# Altium PCB Board Seven Segment.PcbDoc
Units mm, origin at the board's own origin, x right, y up, seen from the top; angles counter-clockwise.
Board outline 140 x 90 mm, 2 copper layers (Top Layer, Bottom Layer); 41 components, 32 nets, 73 pads, 0 vias.
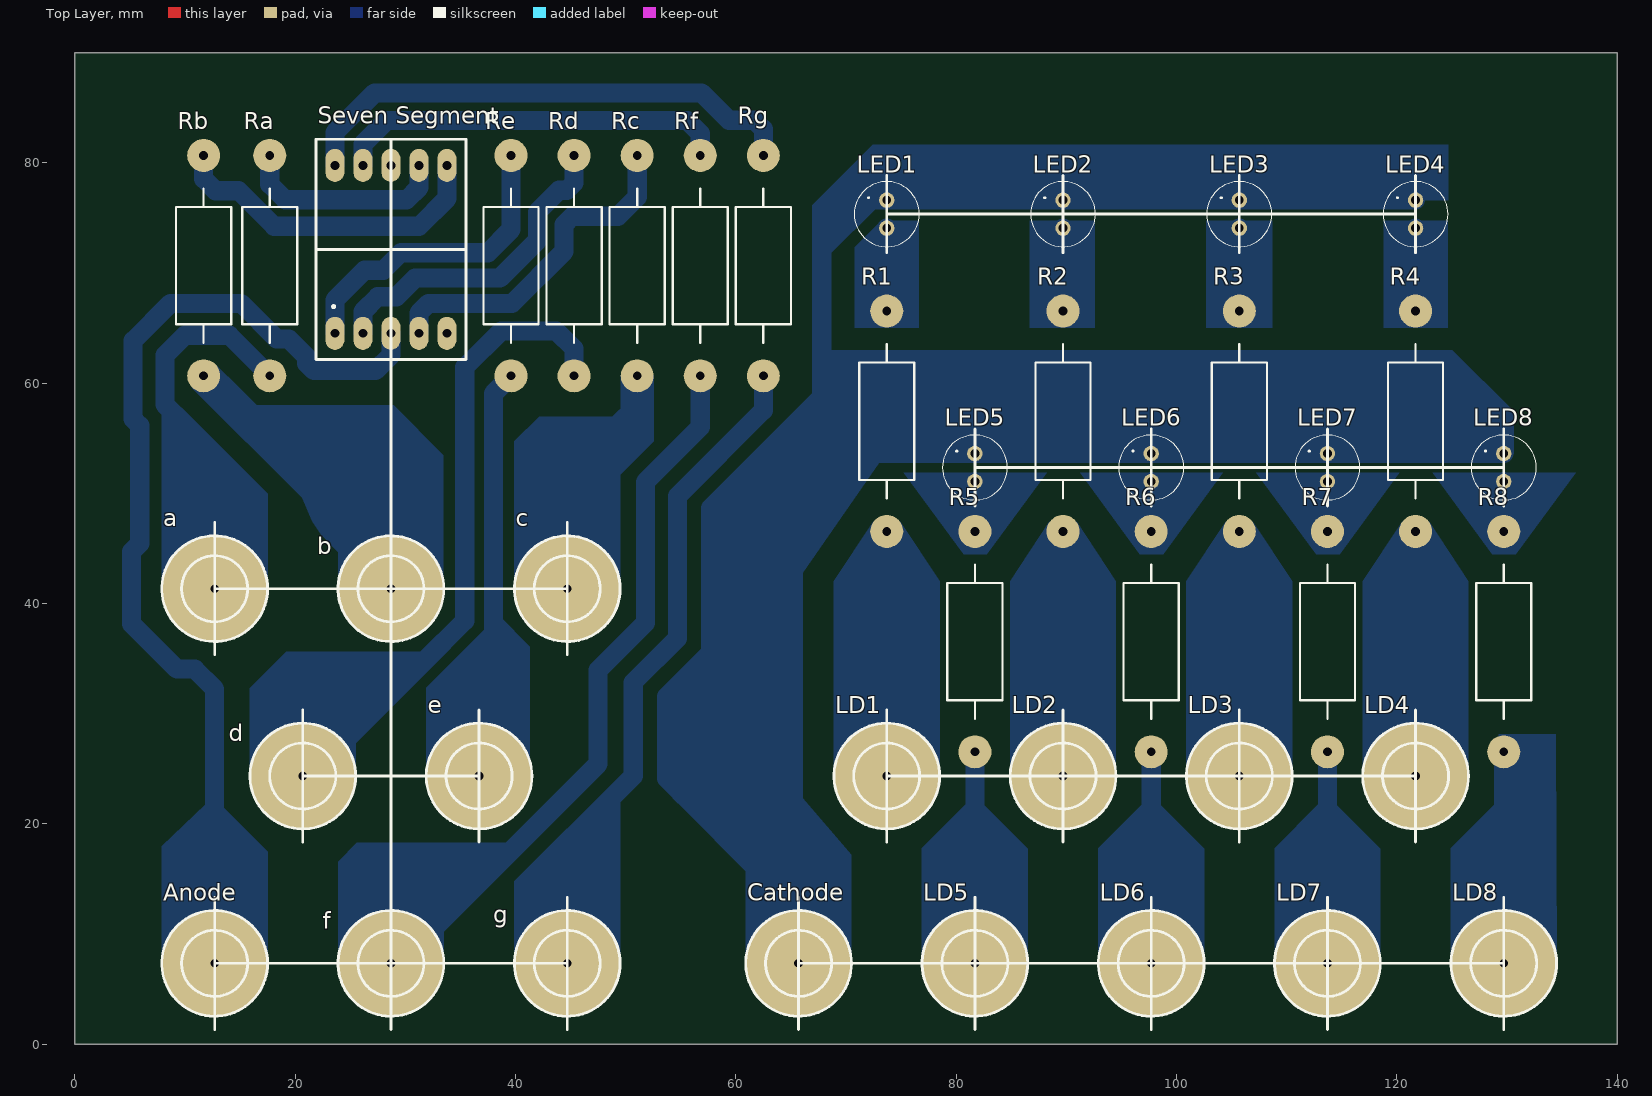
[diagram p0: Top Layer view]
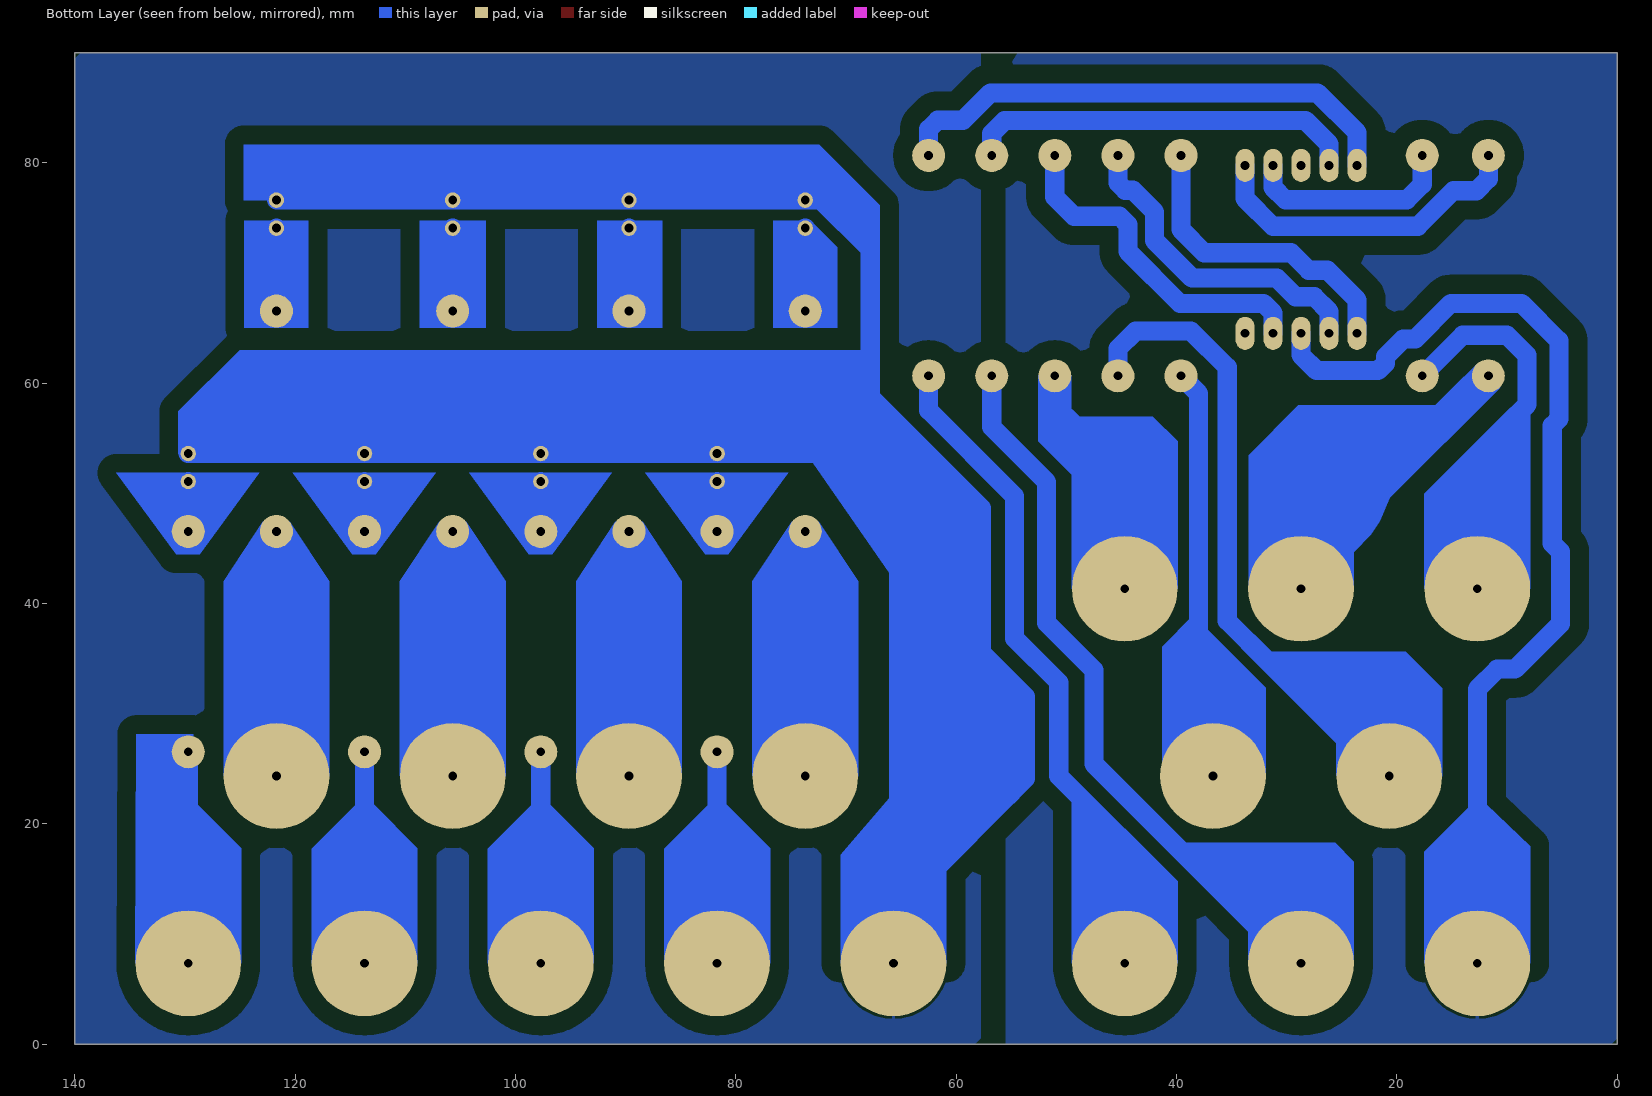
[diagram p1: Bottom Layer view, seen from below]

## Layer stack, top to bottom
Top Solder: solder mask 0.0102, Solder Resist, Dk 3.5
Top Layer: signal copper 0.0356
Dielectric 1: dielectric 0.32, FR-4, Dk 4.8
Bottom Layer: signal copper 0.0356
Bottom Solder: solder mask 0.0102, Solder Resist, Dk 3.5

## Board outline
0,0 140,0 140,90.001 0,90.001

## Design rules (kind name [scope] priority, off if disabled: settings)
Clearance [All] p1: gap=1.75 ignorepadtopadclearanceinfootprint=FALSE
PolygonConnect [All] p1: connectstyle=Relief reliefconductorwidth=0.254 reliefentries=4 polygonreliefangle="90 Angle" airgapwidth=0.254
RoutingVias [All] p1: holewidth=0.711 width=1.27 viastyle="Through Hole" minholewidth=0.711 minwidth=1.27 maxholewidth=0.711 maxwidth=1.27
SolderMaskExpansion [All] p1: expansion=0.102
Width [All] p1: maxlimit=0.254 minlimit=0.254 preferedwidth=0.254
30 further rules are at their usual default settings.

## Components (designator, comment, footprint, x,y, rotation, side; value= is the part's Value field where it differs from the comment)
a "Female_Connector_Banana" F_BANANA 12.7,41.353 r0 top locked
Anode "Female_Connector_Banana" F_BANANA 12.7,7.353 r0 top locked
b "Female_Connector_Banana" F_BANANA 28.7,41.353 r90 top locked
c "Female_Connector_Banana" F_BANANA 44.7,41.353 r0 top locked
Cathode "Female_Connector_Banana" F_BANANA 65.7,7.353 r0 top locked
d "Female_Connector_Banana" F_BANANA 20.7,24.353 r90 top locked
e "Female_Connector_Banana" F_BANANA 36.7,24.353 r0 top locked
f "Female_Connector_Banana" F_BANANA 28.7,7.353 r90 top locked
g "Female_Connector_Banana" F_BANANA 44.7,7.353 r90 top locked
LD1 "Female_Connector_Banana" F_BANANA 73.7,24.353 r0 top locked
LD2 "Female_Connector_Banana" F_BANANA 89.7,24.353 r0 top locked
LD3 "Female_Connector_Banana" F_BANANA 105.7,24.353 r0 top locked
LD4 "Female_Connector_Banana" F_BANANA 121.7,24.353 r0 top locked
LD5 "Female_Connector_Banana" F_BANANA 81.7,7.353 r0 top locked
LD6 "Female_Connector_Banana" F_BANANA 97.7,7.353 r0 top locked
LD7 "Female_Connector_Banana" F_BANANA 113.7,7.353 r0 top locked
LD8 "Female_Connector_Banana" F_BANANA 129.7,7.353 r0 top locked
LED1 "228-5045" 2285045 73.7,75.353 r0 top locked
LED2 "228-5045" 2285045 89.7,75.353 r0 top locked
LED3 "228-5045" 2285045 105.7,75.353 r0 top locked
LED4 "228-5045" 2285045 121.7,75.353 r0 top locked
LED5 "228-5045" 2285045 81.7,52.353 r0 top locked
LED6 "228-5045" 2285045 97.7,52.353 r0 top locked
LED7 "228-5045" 2285045 113.7,52.353 r0 top locked
LED8 "228-5045" 2285045 129.7,52.353 r0 top locked
R1 "1K" Resistor 73.7,56.553 r270 top locked
R2 "1K" Resistor 89.7,56.553 r270 top locked
R3 "1K" Resistor 105.7,56.553 r270 top locked
R4 "1K" Resistor 121.7,56.553 r270 top locked
R5 "1K" Resistor 81.7,36.553 r270 top locked
R6 "1K" Resistor 97.7,36.553 r270 top locked
R7 "1K" Resistor 113.7,36.553 r270 top locked
R8 "1K" Resistor 129.7,36.553 r270 top locked
Ra "1K" Resistor 17.7,70.678 r270 top locked
Rb "1K" Resistor 11.7,70.678 r270 top locked
Rc "1K" Resistor 51.05,70.678 r90 top locked
Rd "1K" Resistor 45.325,70.678 r90 top locked
Re "1K" Resistor 39.6,70.678 r90 top locked
Rf "1K" Resistor 56.775,70.678 r270 top locked
Rg "1K" Resistor 62.5,70.678 r270 top locked
"Seven Segment" "5161AS-Seven-Segment" 5161AS-Seven-Segment 28.7,72.153 r0 top locked

## Footprints (in the part's own frame and the unit in brackets; to place one, negate y for a bottom-side part, rotate by r counter-clockwise, add the part's x,y. Pads: shape width x height; smd on the part's side, far side on the other; paste and mask are expansions set on the pad)
5161AS-Seven-Segment [mm]
  oval 1.72x3 hole 0.8: 1(-5.08,-7.62) 2(-2.54,-7.62) 3(0,-7.62) 4(2.54,-7.62) 5(5.08,-7.62) 6(5.08,7.62) 7(2.54,7.62) 8(0,7.62) 9(-2.54,7.62) 10(-5.08,7.62)
  silkscreen extent -6.8,-10 6.8,10, body extent -6.3,-9.5 6.3,9.5, height 8
2285045 [mm]
  round 1.4 hole 0.8: 1(0,1.27) 2(0,-1.27)
  silkscreen extent -2.95,-2.95 2.95,2.95, body extent -2.95,-2.95 2.95,2.95, height 9.05
F_BANANA [mm]
  round 9.6 hole 0.8: 1(0,0)
  silkscreen extent -4.8,-4.8 4.8,4.8
Resistor [mm]
  round 3 hole 0.8: 1(-10,0) 2(10,0)
  silkscreen extent -7,-2.5 7,2.5

## Part data
LED1 LED2 LED3 LED4 LED5 LED6 LED7 LED8: "LED", Manufacturer_Name="RS Components", Datasheet Link=https://docs-emea.rs-online.com/webdocs/1382/0900766b813828ab.pdf, Height=8.95mm, Manufacturer_Part_Number=228-5045
R1 R2 R3 R4 R5 R6 R7 R8 Ra Rb Rc Rd Re Rf Rg: library part Resistor, "Fixed Resistance"

## Nets (pads, with @x,y where several pads share a name; then routed paths per layer and width w, separated by ;. In a path a pad name is that pad's centre, name@x,y a point inside that pad or via, vN(x,y) a via of type N, cw(c..) or ccw(c..) an arc to the next point about the centre after c; other vN are vias at no path point)
Neta_1: a.1 Ra.2 | length 34.8
  Bottom Layer w1.74: a.1 12.7,53.564 8.2,58.064 8.2,62.553 10,64.353 14.025,64.353 Ra.2
NetAnode_1: "Seven Segment.3" Anode.1 | length 91.4
  Bottom Layer w1.74: Anode.1 12.7,32.253 10.9,34.053 9.281,34.053 5.154,38.18 5.154,44.707 5.9,45.453 5.9,56.153 5.3,56.753 5.3,63.853 8.7,67.253 15.105,67.253 18.336,64.022 19.42,64.022 21.038,62.404 21.038,61.823 21.708,61.153 27.3,61.153 28.7,62.553 28.7,64.533
Netb_1: b.1 Rb.2 | length 33
  Bottom Layer w1.74: Rb.2 15.325,57.053 26.7,57.053 28.7,55.053 b.1
Netc_1: c.1 Rc.1 | length 23.9
  Bottom Layer w1.74: c.1 44.7,55.008 45.762,56.07 49.116,56.07 51.05,58.004 Rc.1
NetCathode_1: Cathode.1 LED1.1 LED2.1 LED3.1 LED4.1 LED5.1 LED6.1 LED7.1 LED8.1 | length 201.8
  Bottom Layer w1.74: Cathode.1 65.7,19.953 64.2,21.453 56.4,21.453 53.7,24.153 53.7,31.553 57.7,35.553 57.7,48.653 67.8,58.753 ; LED4.1 LED3.1 LED2.1 LED1.1 72.27,76.623 67.8,72.153 67.8,58.753 ; LED8.1 LED7.1 LED6.1 LED5.1 69.73,53.623 67.8,55.553 67.8,58.753
Netd_1: d.1 Rd.1 | length 63.1
  Bottom Layer w1.74: d.1 20.7,33.153 22.3,34.753 31.7,34.753 35.4,38.453 35.4,61.453 38.7,64.753 43.7,64.753 45.325,63.128 Rd.1
Nete_1: e.1 Re.1 | length 37.5
  Bottom Layer w1.74: e.1 36.7,35.953 38,37.253 38,59.078 Re.1
Netf_1: f.1 Rf.2 | length 70.5
  Bottom Layer w1.74: f.1 28.7,16.153 30,17.453 39.5,17.453 47.5,25.453 47.5,33.953 51.8,38.253 51.8,51.053 56.775,56.028 Rf.2
Netg_1: g.1 Rg.2 | length 60.7
  Bottom Layer w1.74: g.1 44.7,18.353 50.7,24.353 50.7,32.853 54.7,36.853 54.7,49.753 62.5,57.553 Rg.2
NetLD1_1: LD1.1 R1.2 | length 22.2
  Bottom Layer w1.74: LD1.1 R1.2
NetLD2_1: LD2.1 R2.2 | length 22.2
  Bottom Layer w1.74: LD2.1 R2.2
NetLD3_1: LD3.1 R3.2 | length 22.2
  Bottom Layer w1.74: LD3.1 R3.2
NetLD4_1: LD4.1 R4.2 | length 22.2
  Bottom Layer w1.74: LD4.1 R4.2
NetLD5_1: LD5.1 R5.2 | length 19.2
  Bottom Layer w1.74: LD5.1 R5.2
NetLD6_1: LD6.1 R6.2 | length 19.2
  Bottom Layer w1.74: LD6.1 R6.2
NetLD7_1: LD7.1 R7.2 | length 19.2
  Bottom Layer w1.74: LD7.1 R7.2
NetLD8_1: LD8.1 R8.2 | length 19.2
  Bottom Layer w1.74: LD8.1 R8.2
NetLED1_2: LED1.2 R1.1 | length 7.5
  Bottom Layer w1.74: R1.1 LED1.2
NetLED2_2: LED2.2 R2.1 | length 7.5
  Bottom Layer w1.74: R2.1 LED2.2
NetLED3_2: LED3.2 R3.1 | length 7.5
  Bottom Layer w1.74: R3.1 LED3.2
NetLED4_2: LED4.2 R4.1 | length 7.5
  Bottom Layer w1.74: R4.1 LED4.2
NetLED5_2: LED5.2 R5.1 | length 4.5
  Bottom Layer w1.74: R5.1 LED5.2
NetLED6_2: LED6.2 R6.1 | length 4.5
  Bottom Layer w1.74: R6.1 LED6.2
NetLED7_2: LED7.2 R7.1 | length 4.5
  Bottom Layer w1.74: R7.1 LED7.2
NetLED8_2: LED8.2 R8.1 | length 4.5
  Bottom Layer w1.74: R8.1 LED8.2
NetRa_1: "Seven Segment.7" Ra.1 | length 19.2
  Bottom Layer w1.74: Ra.1 17.7,78.053 19.1,76.653 30.123,76.653 31.24,77.77 31.24,79.773
NetRb_1: "Seven Segment.6" Rb.1 | length 30
  Bottom Layer w1.74: Rb.1 11.7,78.553 12.775,77.478 14.875,77.478 18.1,74.253 31.259,74.253 33.78,76.774 33.78,79.773
NetRc_2: "Seven Segment.4" Rc.2 | length 31.2
  Bottom Layer w1.74: 31.24,64.533 31.24,66.393 32.1,67.253 39.7,67.253 44.4,71.953 44.4,74.389 45.164,75.153 49.3,75.153 51.05,76.903 Rc.2
NetRd_2: "Seven Segment.2" Rd.2 | length 30
  Bottom Layer w1.74: 26.16,64.533 26.16,66.513 27.5,67.853 29.2,67.853 30.9,69.553 38.6,69.553 42,72.953 42,75.555 43.96,77.515 44.65,77.515 45.325,78.19 Rd.2
NetRe_2: "Seven Segment.1" Re.2 | length 28.4
  Bottom Layer w1.74: 23.62,64.533 23.62,67.573 26.3,70.253 28,70.253 29.6,71.853 37.5,71.853 39.6,73.953 Re.2
NetRf_1: "Seven Segment.9" Rf.1 | length 35.9
  Bottom Layer w1.74: 26.16,79.773 26.16,81.713 28.3,83.853 55.6,83.853 56.775,82.678 Rf.1
NetRg_1: "Seven Segment.10" Rg.1 | length 47.1
  Bottom Layer w1.74: 23.62,79.773 23.62,82.773 27.2,86.353 56.9,86.353 59.375,83.878 61.675,83.878 62.5,83.053 Rg.1
pads on no net: "Seven Segment.5" "Seven Segment.8"

## Polygon pours and split planes (outlines as drawn)
NetCathode_1 on Bottom Layer "Bottom Layer-NetCathode_1" (solid, pour order 16): 140.004,90.001 57.757,90.001 57.753,0.002 140,0.002
NetAnode_1 on Bottom Layer "Bottom Layer-NetAnode_1" (solid, pour order 8): 55.506,90.001 0.004,90.001 0,0.002 55.502,0.002
no net on Bottom Layer "Bottom Layer-No Net" (solid, pour order 4): 3.295,0.448

## Other copper
Bottom Layer:
  region net Netf_1: 41.225,17.948 33.5,10.223 33.5,7.353 23.9,7.353 23.9,16.595 25.595,18.29 39.499,18.29
  region net NetAnode_1: 12.7,7.353 17.5,7.354 17.5,17.47 13.198,21.772 11.874,21.772 7.905,17.992 7.905,7.36
  region net NetCathode_1: 66.931,71.725 66.931,76.15 72.442,81.661 124.65,81.661 124.65,76.623 71.895,76.623 70.347,75.075
  region net Nete_1: 31.9,24.353 31.9,32.365 38.467,38.932 41.319,36.08 41.319,24.353 40.925,24.353
  region net Netd_1: 20.7,24.353 15.9,24.353 15.902,32.337 19.188,35.623 33.012,35.623 33.012,34.826 25.5,27.314 25.5,24.357
  region net Neta_1: 12.7,41.353 7.9,41.349 7.9,57.134 7.635,57.399 7.635,57.796 9.698,57.796 17.499,49.995 17.499,41.372
  region net Netg_1: 39.9,14.783 39.9,7.346 49.5,7.346 49.493,7.353 49.493,24.376
  region net Netb_1: 11.7,60.678 10.629,59.601 20.635,49.595 21.554,47.476 22.364,46.245 23.929,44.68 23.902,44.653 23.902,41.336 33.497,41.336 33.46,41.373 33.46,53.483 28.957,57.986 16.515,57.986 15,59.501 12.775,61.726
  region net Netc_1: 44.7,41.353 49.5,41.353 49.5,51.685 52.548,54.733 52.548,60.739 49.551,60.739 49.542,60.73 49.542,56.981 42.16,56.981 39.9,54.721 39.9,41.353
  region net NetCathode_1: 66.076,22.323 66.076,42.803 73.364,53.318 68.918,57.764 66.311,57.764 57.346,48.799 57.346,35.388 53.745,31.787 53.795,31.737 53.795,23.84 54.724,23.84 56.252,22.312
  region net NetCathode_1: 55.258,21.365 60.9,15.723 60.9,7.355 70.498,7.355 70.498,17.212 66.076,22.323 54.3,22.323
  region net NetLED4_2: 118.8,65.053 118.8,74.763 121.2,74.763 124.6,74.763 124.6,65.053
  region net NetLED3_2: 102.7,65.053 102.7,74.763 105.2,74.763 108.7,74.763 108.7,65.053
  region net NetLED2_2: 86.7,65.053 86.7,74.763 89.2,74.763 92.6,74.763 92.6,65.053
  region net NetLED1_2: 70.8,65.053 70.8,72.363 73.2,74.763 76.6,74.763 76.6,65.053
  region net NetLED1_2: 73.7,66.553
  region net NetLED1_2: 73.7,66.553
  region net NetLED1_2: 73.693,74.947
  region net NetLED1_2: 73.7,74.763
  region net NetLED1_2: 73.7,74.083
  region net NetCathode_1: 130.598,53.623 130.594,57.447 125.036,63.005 68.235,63.005 68.235,55.118 69.73,53.623
  region net NetLED8_2: 129.71,51.862 123.256,51.862 128.672,44.499 130.794,44.499 136.214,51.863
  region net NetLED7_2: 113.71,51.862 107.256,51.862 112.672,44.499 114.794,44.499 120.214,51.863
  region net NetLED6_2: 97.71,51.862 91.256,51.862 96.672,44.499 98.794,44.499 104.214,51.863
  region net NetLED5_2: 81.71,51.862 75.256,51.862 80.672,44.499 82.794,44.499 88.214,51.863
  region net NetLD4_1: 121.7,24.353 116.9,24.353 116.9,42.016 120.47,47.411 122.934,47.411 126.499,42.016 126.499,24.392
  region net NetLD3_1: 105.7,24.353 100.9,24.353 100.9,42.016 104.47,47.411 106.934,47.411 110.499,42.016 110.499,24.392
  region net NetLD2_1: 89.7,24.353 84.9,24.353 84.9,42.016 88.47,47.411 90.934,47.411 94.499,42.016 94.499,24.392
  region net NetLD1_1: 73.7,24.353 68.9,24.353 68.9,42.016 72.47,47.411 74.934,47.411 78.499,42.016 78.499,24.392
  region net NetLD8_1: 129.7,7.353 124.9,7.353 124.9,17.81 129.267,22.177 129.267,28.146 134.417,28.146 134.5,7.358
  region net NetLD7_1: 113.7,7.353 108.9,7.353 108.9,17.81 112.926,21.836 114.422,21.836 118.5,17.758 118.5,7.358
  region net NetLD6_1: 97.7,7.353 92.9,7.353 92.9,17.81 96.926,21.836 98.422,21.836 102.5,17.758 102.5,7.358
  region net NetLD5_1: 81.7,7.353 76.9,7.353 76.9,17.81 80.926,21.836 82.422,21.836 86.5,17.758 86.5,7.358
  region: 37.12,37.609
  region net Nete_1: 37.1,37.553

## Silkscreen, mask and mechanical layers (free items; w line width, h text height)
Top Overlay:
  lines w0.254: 12.7,1.353 12.7,13.353 ; 12.7,7.353 44.7,7.353 ; 12.7,35.353 12.7,47.353 ; 12.7,41.353 44.7,41.353 ; 20.7,18.353 20.7,30.353 ; 20.7,24.353 36.7,24.353 ; 22.7,72.153 34.7,72.153 ; 28.7,1.353 28.7,13.353 ; 28.7,7.353 28.7,72.153 ; 28.7,35.353 28.7,47.353 ; 36.7,18.353 36.7,30.353 ; 44.7,1.353 44.7,13.353 ; 44.7,35.353 44.7,47.353 ; 65.7,1.353 65.7,13.353 ; 65.7,7.353 129.7,7.353 ; 73.7,18.353 73.7,30.353 ; 73.7,24.353 121.7,24.353 ; 73.7,71.853 73.7,78.853 ; 73.7,75.353 121.7,75.353 ; 81.7,1.353 81.7,13.353 ; 81.7,48.853 81.7,55.853 ; 81.7,52.353 129.7,52.353 ; 89.7,18.353 89.7,30.353 ; 89.7,71.853 89.7,78.853 ; 97.7,1.353 97.7,13.353 ; 97.7,48.853 97.7,55.853 ; 105.7,18.353 105.7,30.353 ; 105.7,71.853 105.7,78.853 ; 113.7,1.353 113.7,13.353 ; 113.7,48.853 113.7,55.853 ; 121.7,18.353 121.7,30.353 ; 121.7,71.853 121.7,78.853 ; 129.7,1.353 129.7,13.353 ; 129.7,48.853 129.7,55.853

## Dimensions
0,0 to 0,90.001 on Top Overlay
0,90.001 to 140,90.001 on Top Overlay